# EAGLE board LocoShield_array (EAGLE 7.7.0)
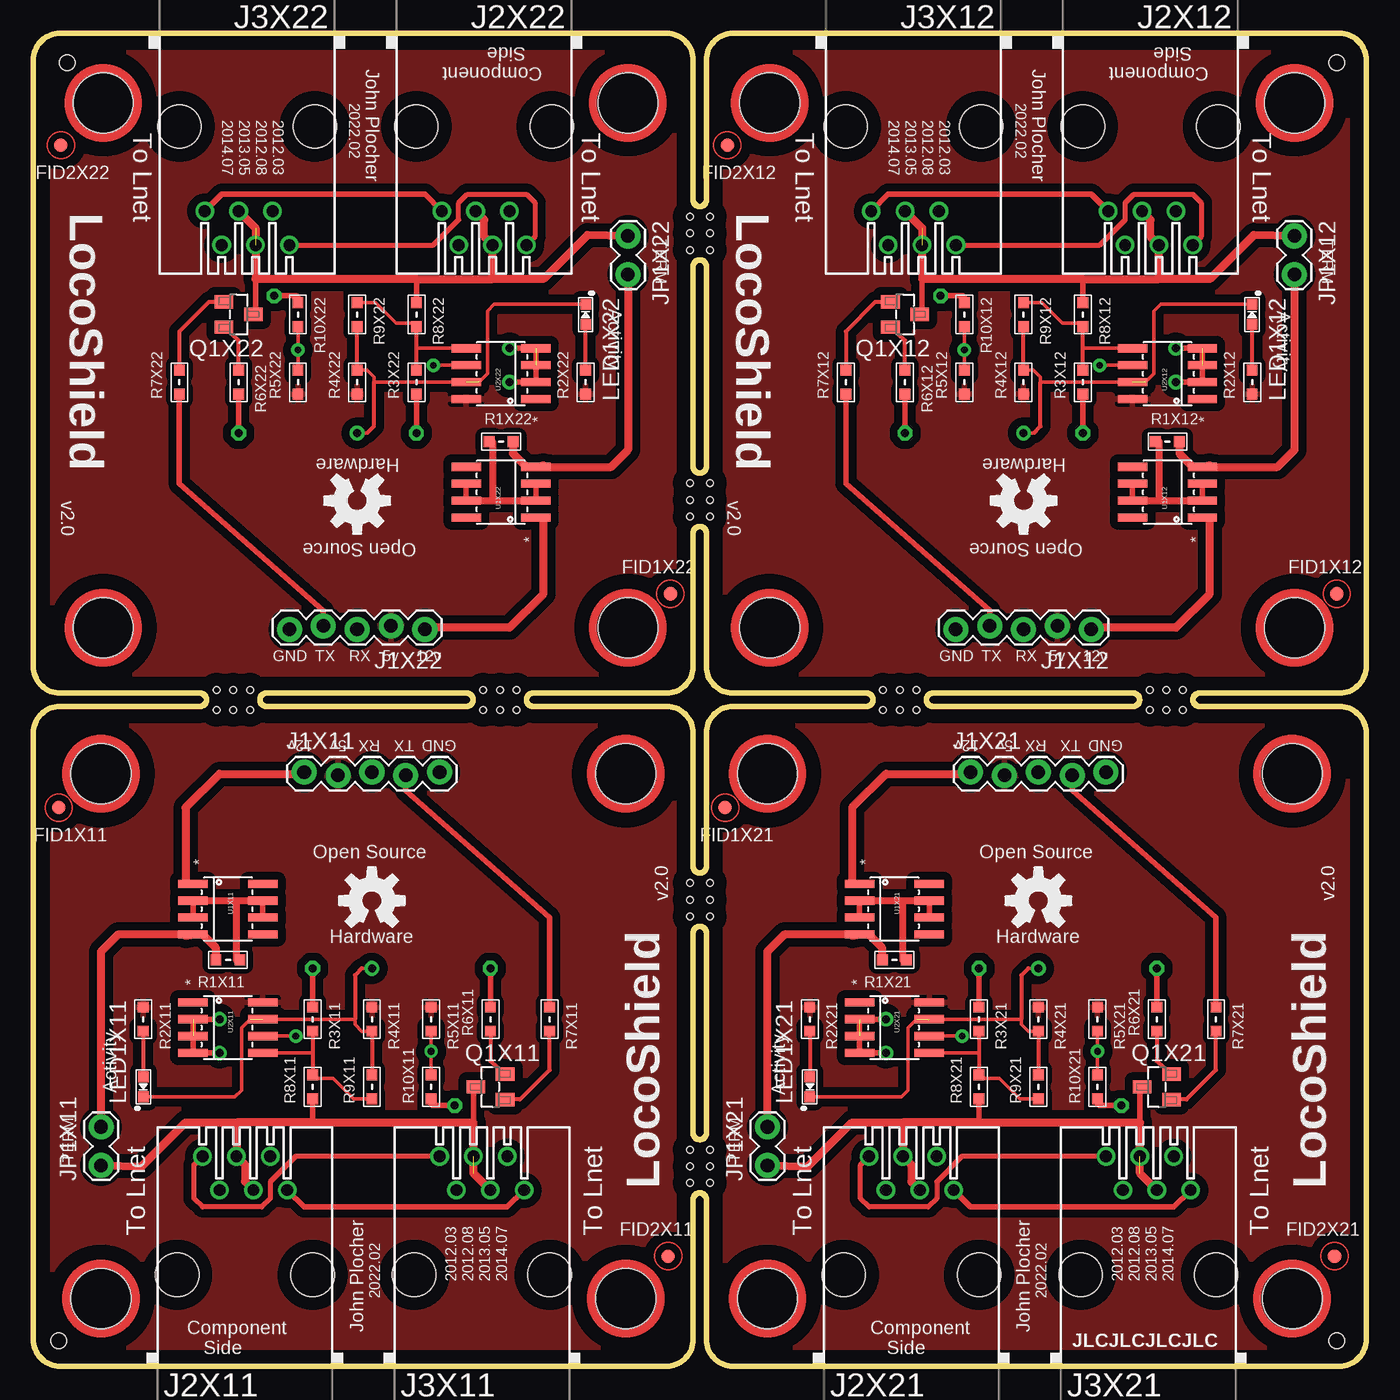
[diagram p0: board, top side]
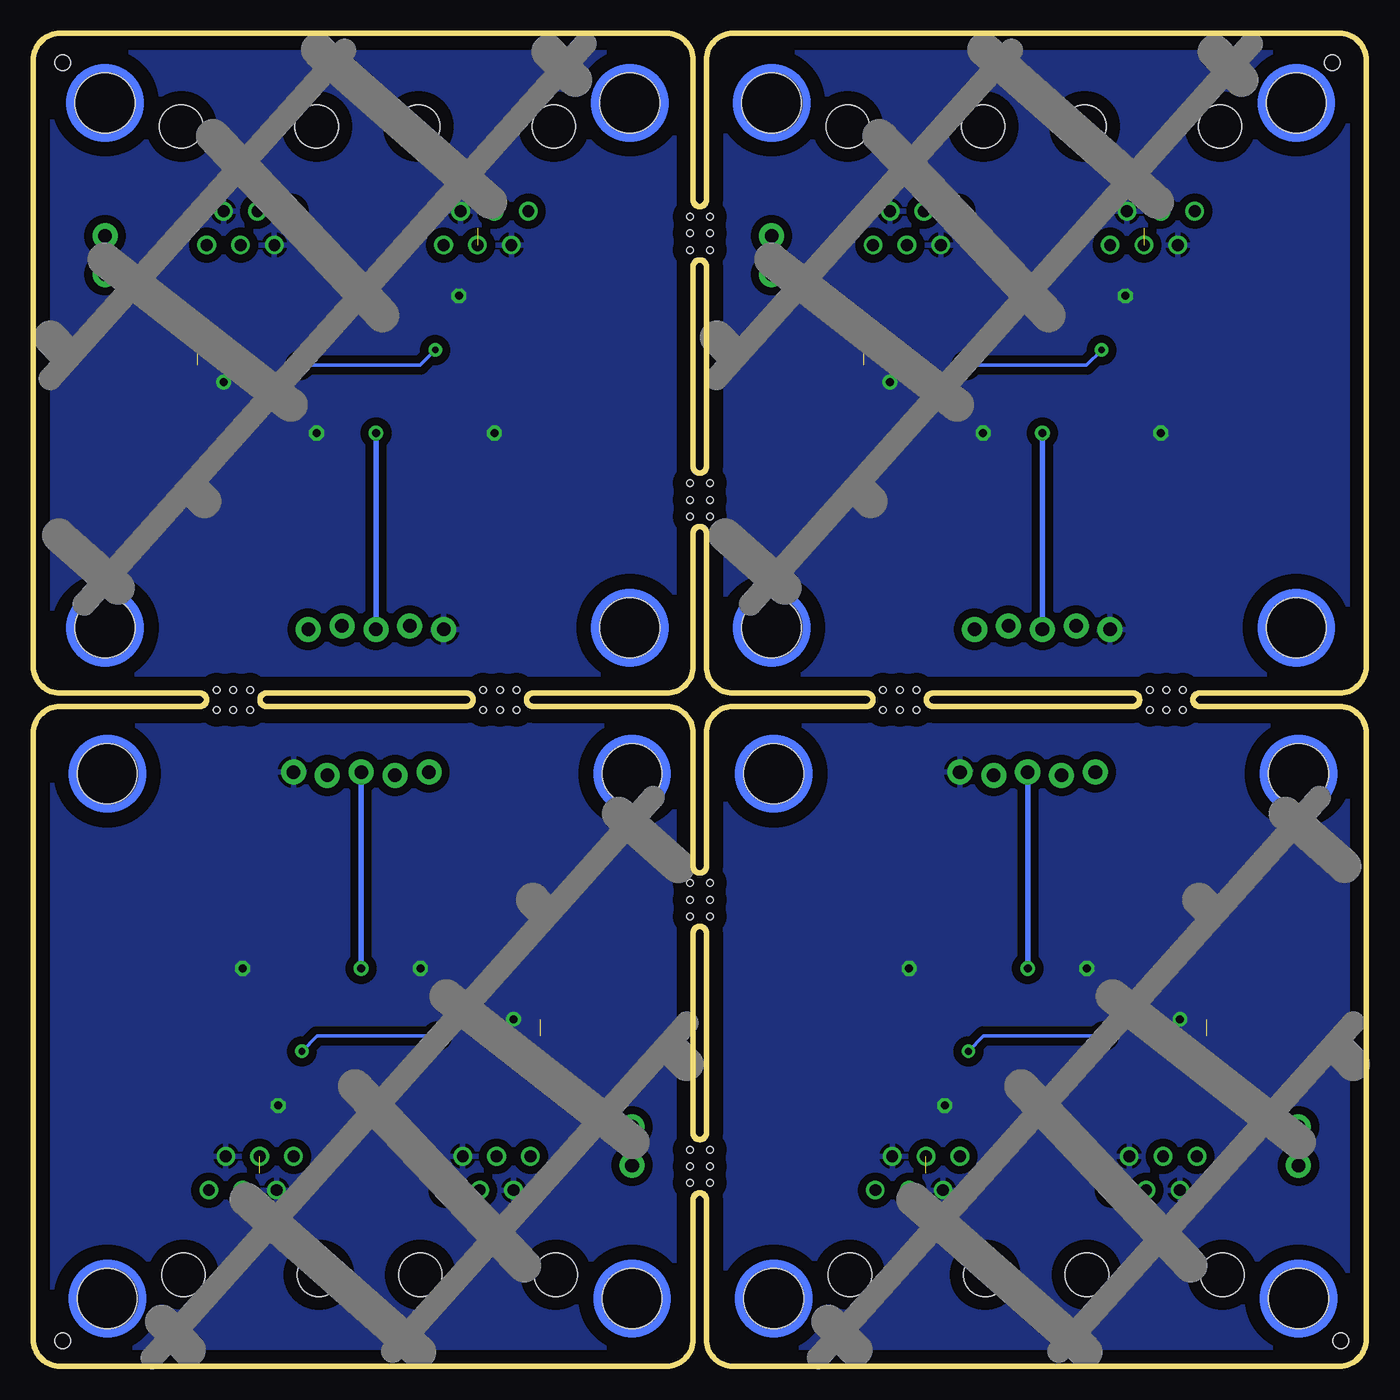
[diagram p1: board, bottom side, seen from below]

Size 100 x 100 mm. Coordinates in mm from the lower left corner, seen from the top.
Copper layers (1*16): Top 0.035mm / dielectric 1.5mm / Bottom 0.035mm
Design rules "default": minimum track width 10mil, minimum drill 0.6mm, track to track 8mil, track to pad 8mil, pad to pad 8mil, via to via 8mil, smd to smd 8mil, copper to edge 40mil, drill to drill 8mil, minimum pad ring 10mil, minimum via ring 8mil, stop-mask expansion 4mil, vias tented up to drill 0mil, thermal gap 10mil

## Footprints (pad centres in the part's own frame; a part is rotated, then mirrored left to right if it is on the bottom)
FIDUCIAL_1MM = smd 1 x 1: 1 0,0
MOUNTINGHOLE-L = hole 4.5: 0,0
1X05_LOCK = drill 1.016 pad 1.88: 1 0,0.127; 2 2.54,-0.127; 3 5.08,0.127; 4 7.62,-0.127; 5 10.16,0.127
RJ25-PANEL = drill 0.889: 1 -3.175,8.89; 2 -1.905,6.35; 3 -0.635,8.89; 4 0.635,6.35; 5 1.905,8.89; 6 3.175,6.35 | hole 3.251: -5.08,0; 5.08,0
1X02_LOCK = drill 1.016 pad 1.88: 1 -0.178,0; 2 2.718,0
0603-LED = smd 0.8 x 0.8: A 0.75,0; C -0.75,0
SOT23 = smd 1.4 x 1: 1 1.1,-0.95; 2 1.1,0.95; 3 -1.1,0
0603-RES = smd 0.813 x 0.813: 1 -0.9,0; 2 0.9,0
SO08 = smd 0.61 x 2.21: 1 -1.905,-2.616; 2 -0.635,-2.616; 3 0.635,-2.616; 4 1.905,-2.616; 5 1.905,2.616; 6 0.635,2.616; 7 -0.635,2.616; 8 -1.905,2.616
BOARD-10X10-2X2-PANEL-MB = hole 0.5: 49.25,86.25; 49.25,85; 49.25,83.75; 50.75,86.25; 50.75,85; 50.75,83.75; 49.25,66.25; 49.25,65; 49.25,63.75; 50.75,66.25; 50.75,65; 50.75,63.75; 49.25,36.25; 49.25,35; 49.25,33.75; 50.75,36.25; 50.75,35; 50.75,33.75; 49.25,16.25; 49.25,15; 49.25,13.75; 50.75,16.25; 50.75,15; 50.75,13.75; 13.75,49.25; 15,49.25; 16.25,49.25; 13.75,50.75; 15,50.75; 16.25,50.75; 33.75,49.25; 35,49.25; 36.25,49.25; 33.75,50.75; 35,50.75; 36.25,50.75; 63.75,49.25; 65,49.25; 66.25,49.25; 63.75,50.75; 65,50.75; 66.25,50.75; 83.75,49.25; 85,49.25; 86.25,49.25; 83.75,50.75; 85,50.75; 86.25,50.75
MOUNTINGHOLE-TOOL = hole 1.152: 0,0

## Placement (x,y rotation side)
FID1X11  FIDUCIAL  [FIDUCIAL_1MM]  1.91,41.91 0 top
FID1X12  FIDUCIAL  [FIDUCIAL_1MM]  97.79,57.95 180 top
FID1X21  FIDUCIAL  [FIDUCIAL_1MM]  51.91,41.91 0 top
FID1X22  FIDUCIAL  [FIDUCIAL_1MM]  47.79,57.95 180 top
FID2X11  FIDUCIAL  [FIDUCIAL_1MM]  47.62,8.26 180 top
FID2X12  FIDUCIAL  [FIDUCIAL_1MM]  52.07,91.61 0 top
FID2X21  FIDUCIAL  [FIDUCIAL_1MM]  97.62,8.26 180 top
FID2X22  FIDUCIAL  [FIDUCIAL_1MM]  2.07,91.61 0 top
H1X11  MOUNTINGHOLEL  [MOUNTINGHOLE-L]  5.08,44.45 0 top
H1X12  MOUNTINGHOLEL  [MOUNTINGHOLE-L]  94.61,55.41 180 top
H1X21  MOUNTINGHOLEL  [MOUNTINGHOLE-L]  55.08,44.45 0 top
H1X22  MOUNTINGHOLEL  [MOUNTINGHOLE-L]  44.62,55.41 180 top
H2X11  MOUNTINGHOLEL  [MOUNTINGHOLE-L]  44.45,44.45 0 top
H2X12  MOUNTINGHOLEL  [MOUNTINGHOLE-L]  55.24,55.41 180 top
H2X21  MOUNTINGHOLEL  [MOUNTINGHOLE-L]  94.45,44.45 0 top
H2X22  MOUNTINGHOLEL  [MOUNTINGHOLE-L]  5.25,55.41 180 top
H3X11  MOUNTINGHOLEL  [MOUNTINGHOLE-L]  44.45,5.08 0 top
H3X12  MOUNTINGHOLEL  [MOUNTINGHOLE-L]  55.24,94.78 180 top
H3X21  MOUNTINGHOLEL  [MOUNTINGHOLE-L]  94.45,5.08 0 top
H3X22  MOUNTINGHOLEL  [MOUNTINGHOLE-L]  5.25,94.78 180 top
H4X11  MOUNTINGHOLEL  [MOUNTINGHOLE-L]  5.08,5.08 0 top
H4X12  MOUNTINGHOLEL  [MOUNTINGHOLE-L]  94.61,94.78 180 top
H4X21  MOUNTINGHOLEL  [MOUNTINGHOLE-L]  55.08,5.08 0 top
H4X22  MOUNTINGHOLEL  [MOUNTINGHOLE-L]  44.62,94.78 180 top
J1X11  0.100  [1X05_LOCK]  20.32,44.45 0 top
J1X12  0.100  [1X05_LOCK]  79.38,55.41 180 top
J1X21  0.100  [1X05_LOCK]  70.32,44.45 0 top
J1X22  0.100  [1X05_LOCK]  29.38,55.41 180 top
J2X11  RJ12/6  [RJ25-PANEL]  15.88,6.86 0 top
J2X12  RJ12/6  [RJ25-PANEL]  83.82,93 180 top
J2X21  RJ12/6  [RJ25-PANEL]  65.88,6.86 0 top
J2X22  RJ12/6  [RJ25-PANEL]  33.82,93 180 top
J3X11  RJ12/6  [RJ25-PANEL]  33.66,6.86 0 top
J3X12  RJ12/6  [RJ25-PANEL]  66.04,93 180 top
J3X21  RJ12/6  [RJ25-PANEL]  83.66,6.86 0 top
J3X22  RJ12/6  [RJ25-PANEL]  16.04,93 180 top
JP1X11  0.100  [1X02_LOCK]  5.08,15.24 90 top
JP1X12  0.100  [1X02_LOCK]  94.61,84.62 270 top
JP1X21  0.100  [1X02_LOCK]  55.08,15.24 90 top
JP1X22  0.100  [1X02_LOCK]  44.62,84.62 270 top
LED1X11  B  [0603-LED]  8.26,20.95 90 top
LED1X12  B  [0603-LED]  91.44,78.91 270 top
LED1X21  B  [0603-LED]  58.26,20.95 90 top
LED1X22  B  [0603-LED]  41.44,78.91 270 top
Q1X11  2N3904  [SOT23]  34.29,20.95 0 top
Q1X12  2N3904  [SOT23]  65.41,78.91 180 top
Q1X21  2N3904  [SOT23]  84.29,20.95 0 top
Q1X22  2N3904  [SOT23]  15.4,78.91 180 top
R1X11  82R  [0603-RES]  14.61,30.48 180 top
R1X12  82R  [0603-RES]  85.09,69.38 0 top
R1X21  82R  [0603-RES]  64.61,30.48 180 top
R1X22  82R  [0603-RES]  35.09,69.38 0 top
R2X11  470R  [0603-RES]  8.26,26.04 270 top
R2X12  470R  [0603-RES]  91.44,73.83 90 top
R2X21  470R  [0603-RES]  58.26,26.04 270 top
R2X22  470R  [0603-RES]  41.44,73.83 90 top
R3X11  150k  [0603-RES]  20.95,26.04 270 top
R3X12  150k  [0603-RES]  78.74,73.83 90 top
R3X21  150k  [0603-RES]  70.95,26.04 270 top
R3X22  150k  [0603-RES]  28.74,73.83 90 top
R4X11  1k  [0603-RES]  25.4,26.04 270 top
R4X12  1k  [0603-RES]  74.3,73.83 90 top
R4X21  1k  [0603-RES]  75.4,26.04 270 top
R4X22  1k  [0603-RES]  24.3,73.83 90 top
R5X11  27k  [0603-RES]  29.84,26.04 270 top
R5X12  27k  [0603-RES]  69.85,73.83 90 top
R5X21  27k  [0603-RES]  79.84,26.04 270 top
R5X22  27k  [0603-RES]  19.85,73.83 90 top
R6X11  47R  [0603-RES]  34.29,26.04 90 top
R6X12  47R  [0603-RES]  65.41,73.83 270 top
R6X21  47R  [0603-RES]  84.29,26.04 90 top
R6X22  47R  [0603-RES]  15.4,73.83 270 top
R7X11  4k7  [0603-RES]  38.73,26.04 270 top
R7X12  4k7  [0603-RES]  60.96,73.83 90 top
R7X21  4k7  [0603-RES]  88.73,26.04 270 top
R7X22  4k7  [0603-RES]  10.96,73.83 90 top
R8X11  47k  [0603-RES]  20.95,20.95 90 top
R8X12  47k  [0603-RES]  78.74,78.91 270 top
R8X21  47k  [0603-RES]  70.95,20.95 90 top
R8X22  47k  [0603-RES]  28.74,78.91 270 top
R9X11  240k  [0603-RES]  25.4,20.95 90 top
R9X12  240k  [0603-RES]  74.3,78.91 270 top
R9X21  240k  [0603-RES]  75.4,20.95 90 top
R9X22  240k  [0603-RES]  24.3,78.91 270 top
R10X11  39k  [0603-RES]  29.84,20.95 90 top
R10X12  39k  [0603-RES]  69.85,78.91 270 top
R10X21  39k  [0603-RES]  79.84,20.95 90 top
R10X22  39k  [0603-RES]  19.85,78.91 270 top
U1X11  LM317LCDR  [SO08]  14.61,34.29 270 top
U1X12  LM317LCDR  [SO08]  85.09,65.57 90 top
U1X21  LM317LCDR  [SO08]  64.61,34.29 270 top
U1X22  LM317LCDR  [SO08]  35.09,65.57 90 top
U2X1  [BOARD-10X10-2X2-PANEL-MB]  0,0 0 top
U2X2  [MOUNTINGHOLE-TOOL]  2.54,97.79 0 top
U2X3  [MOUNTINGHOLE-TOOL]  97.79,97.79 0 top
U2X4  [MOUNTINGHOLE-TOOL]  1.91,1.91 0 top
U2X5  [MOUNTINGHOLE-TOOL]  97.79,1.91 0 top
U2X11  LM393M  [SO08]  14.61,25.4 270 top
U2X12  LM393M  [SO08]  85.09,74.46 90 top
U2X21  LM393M  [SO08]  64.61,25.4 270 top
U2X22  LM393M  [SO08]  35.09,74.46 90 top
U$3X11  OSHW  [OSHW-LOGO-M]  25.4,34.92 0 top
U$3X12  OSHW  [OSHW-LOGO-M]  74.3,64.94 180 top
U$3X21  OSHW  [OSHW-LOGO-M]  75.4,34.92 0 top
U$3X22  OSHW  [OSHW-LOGO-M]  24.3,64.94 180 top

## Library data of the parts
FID1X11 FID1X12 FID1X21 FID1X22 FID2X11 FID2X12 FID2X21 FID2X22 H1X11 H1X12 H1X21 H1X22 H2X11 H2X12 H2X21 H2X22 H3X11 H3X12 H3X21 H3X22 H4X11 H4X12 H4X21 H4X22 J1X11 J1X12 J1X21 J1X22 J2X11 J2X12 J2X21 J2X22 J3X11 J3X12 J3X21 J3X22 JP1X11 JP1X12 JP1X21 JP1X22 LED1X11 LED1X12 LED1X21 LED1X22 Q1X11 Q1X12 Q1X21 Q1X22 R1X11 R1X12 R1X21 R1X22 R2X11 R2X12 R2X21 R2X22 R3X11 R3X12 R3X21 R3X22 R4X11 R4X12 R4X21 R4X22 R5X11 R5X12 R5X21 R5X22 R6X11 R6X12 R6X21 R6X22 R7X11 R7X12 R7X21 R7X22 R8X11 R8X12 R8X21 R8X22 R9X11 R9X12 R9X21 R9X22 R10X11 R10X12 R10X21 R10X22 U1X11 U1X12 U1X21 U1X22 U2X1-U2X5 U2X11 U2X12 U2X21 U2X22 U$3X11 U$3X12 U$3X21 U$3X22 = SPCoast

## Nets
DCCRAILSYNC-X11: J2X11.1 J3X11.1
DCCRAILSYNC-X12: J2X12.1 J3X12.1
DCCRAILSYNC-X21: J2X21.1 J3X21.1
DCCRAILSYNC-X22: J2X22.1 J3X22.1
GNDX11: J1X11.5 J2X11.2 J2X11.5 J3X11.2 J3X11.5 R3X11.1 R6X11.2 R10X11.1 U2X11.2 U2X11.3 U2X11.4
GNDX12: J1X12.5 J2X12.2 J2X12.5 J3X12.2 J3X12.5 R3X12.1 R6X12.2 R10X12.1 U2X12.2 U2X12.3 U2X12.4
GNDX21: J1X21.5 J2X21.2 J2X21.5 J3X21.2 J3X21.5 R3X21.1 R6X21.2 R10X21.1 U2X21.2 U2X21.3 U2X21.4
GNDX22: J1X22.5 J2X22.2 J2X22.5 J3X22.2 J3X22.5 R3X22.1 R6X22.2 R10X22.1 U2X22.2 U2X22.3 U2X22.4
LNRXX11: J1X11.3 LED1X11.C R4X11.2 R9X11.2 U2X11.7
LNRXX12: J1X12.3 LED1X12.C R4X12.2 R9X12.2 U2X12.7
LNRXX21: J1X21.3 LED1X21.C R4X21.2 R9X21.2 U2X21.7
LNRXX22: J1X22.3 LED1X22.C R4X22.2 R9X22.2 U2X22.7
LNTXX11: J1X11.4 R7X11.1
LNTXX12: J1X12.4 R7X12.1
LNTXX21: J1X21.4 R7X21.1
LNTXX22: J1X22.4 R7X22.1
LOCONETX11: J2X11.3 J2X11.4 J3X11.3 J3X11.4 JP1X11.1 Q1X11.3 R8X11.1
LOCONETX12: J2X12.3 J2X12.4 J3X12.3 J3X12.4 JP1X12.1 Q1X12.3 R8X12.1
LOCONETX21: J2X21.3 J2X21.4 J3X21.3 J3X21.4 JP1X21.1 Q1X21.3 R8X21.1
LOCONETX22: J2X22.3 J2X22.4 J3X22.3 J3X22.4 JP1X22.1 Q1X22.3 R8X22.1
N$1X11: Q1X11.1 R7X11.2
N$1X12: Q1X12.1 R7X12.2
N$1X21: Q1X21.1 R7X21.2
N$1X22: Q1X22.1 R7X22.2
N$2X11: R3X11.2 R8X11.2 R9X11.1 U2X11.5
N$2X12: R3X12.2 R8X12.2 R9X12.1 U2X12.5
N$2X21: R3X21.2 R8X21.2 R9X21.1 U2X21.5
N$2X22: R3X22.2 R8X22.2 R9X22.1 U2X22.5
N$5X11: R5X11.2 R10X11.2 U2X11.6
N$5X12: R5X12.2 R10X12.2 U2X12.6
N$5X21: R5X21.2 R10X21.2 U2X21.6
N$5X22: R5X22.2 R10X22.2 U2X22.6
N$6X11: Q1X11.2 R6X11.1
N$6X12: Q1X12.2 R6X12.1
N$6X21: Q1X21.2 R6X21.1
N$6X22: Q1X22.2 R6X22.1
N$15X11: LED1X11.A R2X11.2
N$15X12: LED1X12.A R2X12.2
N$15X21: LED1X21.A R2X21.2
N$15X22: LED1X22.A R2X22.2
N$20X11: JP1X11.2 R1X11.2 U1X11.4
N$20X12: JP1X12.2 R1X12.2 U1X12.4
N$20X21: JP1X21.2 R1X21.2 U1X21.4
N$20X22: JP1X22.2 R1X22.2 U1X22.4
RAILSYNC+X11: J2X11.6 J3X11.6
RAILSYNC+X12: J2X12.6 J3X12.6
RAILSYNC+X21: J2X21.6 J3X21.6
RAILSYNC+X22: J2X22.6 J3X22.6
V+X11: J1X11.1 U1X11.1
V+X12: J1X12.1 U1X12.1
V+X21: J1X21.1 U1X21.1
V+X22: J1X22.1 U1X22.1
VCCX11: J1X11.2 R2X11.1 R4X11.1 R5X11.1 U2X11.8
VCCX12: J1X12.2 R2X12.1 R4X12.1 R5X12.1 U2X12.8
VCCX21: J1X21.2 R2X21.1 R4X21.1 R5X21.1 U2X21.8
VCCX22: J1X22.2 R2X22.1 R4X22.1 R5X22.1 U2X22.8
VOUTX11: R1X11.1 U1X11.2 U1X11.3 U1X11.6 U1X11.7
VOUTX12: R1X12.1 U1X12.2 U1X12.3 U1X12.6 U1X12.7
VOUTX21: R1X21.1 U1X21.2 U1X21.3 U1X21.6 U1X21.7
VOUTX22: R1X22.1 U1X22.2 U1X22.3 U1X22.6 U1X22.7

## Tracks (layer width: path | path; a pad name or v marks a point on that pad's centre or on a via)
DCCRAILSYNC-X11
  Top 0.381: J2X11.1 12.06,15.11 12.06,12.57 12.7,11.94 17.14,11.94 17.78,12.57 17.78,13.84 19.68,15.75 J3X11.1
DCCRAILSYNC-X12
  Top 0.381: J2X12.1 87.63,84.75 87.63,87.29 87,87.92 82.55,87.92 81.92,87.29 81.92,86.02 80.01,84.11 J3X12.1
DCCRAILSYNC-X21
  Top 0.381: J2X21.1 62.06,15.11 62.06,12.57 62.7,11.94 67.14,11.94 67.78,12.57 67.78,13.84 69.69,15.75 J3X21.1
DCCRAILSYNC-X22
  Top 0.381: J2X22.1 37.63,84.75 37.63,87.29 36.99,87.92 32.55,87.92 31.91,87.29 31.91,86.02 30.01,84.11 J3X22.1
GNDX11  (via drill 0.6 pad 1.11)  (1 unrouted)
  Top 0.406: R6X11.2 v34.29,29.84 | U2X11.2 U2X11.4 v13.97,23.5 | R3X11.1 v20.95,29.84 | R10X11.1 29.84,19.68 29.97,19.56 v31.62,19.56 | v13.97,26.04 11.43,26.04
  pour Bottom (isolate 0.61): 1.02,48.64 48.64,48.64 48.64,1.02 1.02,1.02
GNDX12  (via drill 0.6 pad 1.11)  (1 unrouted)
  Top 0.406: R6X12.2 v65.41,70.02 | U2X12.2 U2X12.4 v85.72,76.36 | R3X12.1 v78.74,70.02 | R10X12.1 69.85,80.17 69.72,80.3 v68.07,80.3 | v85.72,73.83 88.27,73.83
  pour Bottom (isolate 0.61): 98.68,51.22 51.05,51.22 51.05,98.84 98.68,98.84
GNDX21  (via drill 0.6 pad 1.11)  (1 unrouted)
  Top 0.406: R6X21.2 v84.29,29.84 | U2X21.2 U2X21.4 v63.97,23.5 | R3X21.1 v70.95,29.84 | R10X21.1 79.84,19.68 79.97,19.56 v81.62,19.56 | v63.97,26.04 61.43,26.04
  pour Bottom (isolate 0.61): 51.02,48.64 98.64,48.64 98.64,1.02 51.02,1.02
GNDX22  (via drill 0.6 pad 1.11)  (1 unrouted)
  Top 0.406: R6X22.2 v15.4,70.02 | U2X22.2 U2X22.4 v35.73,76.36 | R3X22.1 v28.74,70.02 | R10X22.1 19.85,80.17 19.72,80.3 v18.07,80.3 | v35.73,73.83 38.27,73.83
  pour Bottom (isolate 0.61): 48.68,51.22 1.05,51.22 1.05,98.84 48.68,98.84
LNRXX11  (via drill 0.6 pad 1.11)  (1 unrouted)
  Top 0.254: v25.4,29.84 24.64,29.84 | R4X11.2 24.65,25.14 24.13,25.65 24.13,26.04 16.26,26.04 15.62,25.4 15.62,20.7 15.11,20.19 LED1X11.C
  Top 0.305: R4X11.2 R9X11.2 | 24.64,29.84 24.13,29.34 24.13,26.04
  Bottom 0.406: J1X11.3 v25.4,29.84
LNRXX12  (via drill 0.6 pad 1.11)  (1 unrouted)
  Top 0.254: v74.3,70.02 75.06,70.02 | R4X12.2 75.05,74.72 75.56,74.21 75.56,73.83 83.44,73.83 84.07,74.46 84.07,79.16 84.58,79.67 91.43,79.67 LED1X12.C
  Top 0.305: R4X12.2 R9X12.2 | 75.06,70.02 75.56,70.52 75.56,73.83
  Bottom 0.406: J1X12.3 v74.3,70.02
LNRXX21  (via drill 0.6 pad 1.11)  (1 unrouted)
  Top 0.254: v75.4,29.84 74.64,29.84 | R4X21.2 74.65,25.14 74.13,25.65 74.13,26.04 66.26,26.04 65.62,25.4 65.62,20.7 65.11,20.19 LED1X21.C
  Top 0.305: R4X21.2 R9X21.2 | 74.64,29.84 74.13,29.34 74.13,26.04
  Bottom 0.406: J1X21.3 v75.4,29.84
LNRXX22  (via drill 0.6 pad 1.11)  (1 unrouted)
  Top 0.254: v24.3,70.02 25.06,70.02 | R4X22.2 25.05,74.72 25.57,74.21 25.57,73.83 33.44,73.83 34.07,74.46 34.07,79.16 34.58,79.67 41.43,79.67 LED1X22.C
  Top 0.305: R4X22.2 R9X22.2 | 25.06,70.02 25.57,70.52 25.57,73.83
  Bottom 0.406: J1X22.3 v24.3,70.02
LNTXX11
  Top 0.406: R7X11.1 38.73,33.66 27.94,43.18 J1X11.4
LNTXX12
  Top 0.406: R7X12.1 60.96,66.2 71.75,56.68 J1X12.4
LNTXX21
  Top 0.406: R7X21.1 88.73,33.66 77.94,43.18 J1X21.4
LNTXX22
  Top 0.406: R7X22.1 10.96,66.2 21.75,56.68 J1X22.4
LOCONETX11  (1 unrouted)
  Top 0.406: 33.02,20.95 Q1X11.3 33.02,20.79 33.02,18.29 | R8X11.1 20.95,18.29
  Top 0.61: J2X11.4 15.88,13.84 15.88,15.11 J2X11.3 15.24,18.29 | J3X11.4 33.02,14.48 33.02,18.29 20.95,18.29 15.24,18.29 | JP1X11.1 8.13,14.99 11.43,18.29 15.24,18.29
LOCONETX12  (1 unrouted)
  Top 0.406: 66.67,78.91 Q1X12.3 66.67,79.08 66.67,81.57 | R8X12.1 78.74,81.57
  Top 0.61: J2X12.4 83.82,86.02 83.82,84.75 J2X12.3 84.45,81.57 | J3X12.4 66.67,85.38 66.67,81.57 78.74,81.57 84.45,81.57 | JP1X12.1 91.57,84.87 88.27,81.57 84.45,81.57
LOCONETX21  (1 unrouted)
  Top 0.406: 83.02,20.95 Q1X21.3 83.02,20.79 83.02,18.29 | R8X21.1 70.95,18.29
  Top 0.61: J2X21.4 65.88,13.84 65.88,15.11 J2X21.3 65.24,18.29 | J3X21.4 83.02,14.48 83.02,18.29 70.95,18.29 65.24,18.29 | JP1X21.1 58.13,14.99 61.43,18.29 65.24,18.29
LOCONETX22  (1 unrouted)
  Top 0.406: 16.68,78.91 Q1X22.3 16.68,79.08 16.68,81.57 | R8X22.1 28.74,81.57
  Top 0.61: J2X22.4 33.82,86.02 33.82,84.75 J2X22.3 34.45,81.57 | J3X22.4 16.68,85.38 16.68,81.57 28.74,81.57 34.45,81.57 | JP1X22.1 41.57,84.87 38.27,81.57 34.45,81.57
N$1X11
  Top 0.305: 35.29,20.05 Q1X11.1 36.52,20 38.73,22.23 R7X11.2
N$1X12
  Top 0.305: 64.41,79.81 Q1X12.1 63.18,79.86 60.96,77.64 R7X12.2
N$1X21
  Top 0.305: 85.29,20.05 Q1X21.1 86.52,20 88.73,22.23 R7X21.2
N$1X22
  Top 0.305: 14.4,79.81 Q1X22.1 13.18,79.86 10.96,77.64 R7X22.2
N$2X11
  Top 0.254: R9X11.1 24.01,20.05 22.48,21.59 21.22,21.59 R8X11.2 | U2X11.5 20.95,23.5
  Top 0.305: U2X11.5 17.14,23.5 | R3X11.2 20.95,23.5 R8X11.2
N$2X12
  Top 0.254: R9X12.1 75.68,79.81 77.22,78.27 78.47,78.27 R8X12.2 | U2X12.5 78.74,76.36
  Top 0.305: U2X12.5 82.55,76.36 | R3X12.2 78.74,76.36 R8X12.2
N$2X21
  Top 0.254: R9X21.1 74.01,20.05 72.48,21.59 71.22,21.59 R8X21.2 | U2X21.5 70.95,23.5
  Top 0.305: U2X21.5 67.14,23.5 | R3X21.2 70.95,23.5 R8X21.2
N$2X22
  Top 0.254: R9X22.1 25.68,79.81 27.22,78.27 28.48,78.27 R8X22.2 | U2X22.5 28.74,76.36
  Top 0.305: U2X22.5 32.55,76.36 | R3X22.2 28.74,76.36 R8X22.2
N$5X11  (via drill 0.5 pad 1.01)
  Top 0.254: U2X11.6 v19.68,24.77 | v29.84,23.62 29.84,24.77 | v29.84,23.62 R10X11.2 | v29.84,23.62 R5X11.2
  Top 0.305: U2X11.6 16.51,24.77
  Bottom 0.254: v19.68,24.77 28.7,24.77 v29.84,23.62
N$5X12  (via drill 0.5 pad 1.01)
  Top 0.254: U2X12.6 v80.01,75.09 | v69.85,76.24 69.85,75.09 | v69.85,76.24 R10X12.2 | v69.85,76.24 R5X12.2
  Top 0.305: U2X12.6 83.19,75.09
  Bottom 0.254: v80.01,75.09 70.99,75.09 v69.85,76.24
N$5X21  (via drill 0.5 pad 1.01)
  Top 0.254: U2X21.6 v69.69,24.77 | v79.84,23.62 79.84,24.77 | v79.84,23.62 R10X21.2 | v79.84,23.62 R5X21.2
  Top 0.305: U2X21.6 66.51,24.77
  Bottom 0.254: v69.69,24.77 78.7,24.77 v79.84,23.62
N$5X22  (via drill 0.5 pad 1.01)
  Top 0.254: U2X22.6 v30.01,75.09 | v19.85,76.24 19.85,75.09 | v19.85,76.24 R10X22.2 | v19.85,76.24 R5X22.2
  Top 0.305: U2X22.6 33.19,75.09
  Bottom 0.254: v30.01,75.09 20.99,75.09 v19.85,76.24
N$6X11
  Top 0.305: R6X11.1 34.29,22.91 Q1X11.2
N$6X12
  Top 0.305: R6X12.1 65.41,76.95 Q1X12.2
N$6X21
  Top 0.305: R6X21.1 84.29,22.91 Q1X21.2
N$6X22
  Top 0.305: R6X22.1 15.4,76.95 Q1X22.2
N$15X11
  Top 0.305: R2X11.2 LED1X11.A
N$15X12
  Top 0.305: R2X12.2 LED1X12.A
N$15X21
  Top 0.305: R2X21.2 LED1X21.A
N$15X22
  Top 0.305: R2X22.2 LED1X22.A
N$20X11
  Top 0.406: 11.43,32.38 U1X11.4
  Top 0.61: R1X11.2 13.71,31.38 12.7,32.38 U1X11.4 11.43,32.28 | JP1X11.2 5.08,31.11 6.35,32.38 11.43,32.38
N$20X12
  Top 0.406: 88.27,67.47 U1X12.4
  Top 0.61: R1X12.2 85.99,68.48 87,67.47 U1X12.4 88.27,67.58 | JP1X12.2 94.61,68.75 93.34,67.47 88.27,67.47
N$20X21
  Top 0.406: 61.43,32.38 U1X21.4
  Top 0.61: R1X21.2 63.7,31.38 62.7,32.38 U1X21.4 61.43,32.28 | JP1X21.2 55.08,31.11 56.35,32.38 61.43,32.38
N$20X22
  Top 0.406: 38.27,67.47 U1X22.4
  Top 0.61: R1X22.2 35.99,68.48 36.99,67.47 U1X22.4 38.27,67.58 | JP1X22.2 44.62,68.75 43.34,67.47 38.27,67.47
RAILSYNC+X11
  Top 0.406: J2X11.6 20.32,11.94 35.56,11.94 J3X11.6
RAILSYNC+X12
  Top 0.406: J2X12.6 79.38,87.92 64.14,87.92 J3X12.6
RAILSYNC+X21
  Top 0.406: J2X21.6 70.32,11.94 85.56,11.94 J3X21.6
RAILSYNC+X22
  Top 0.406: J2X22.6 29.38,87.92 14.13,87.92 J3X22.6
V+X11
  Top 0.61: J1X11.1 20.32,44.45 13.97,44.45 11.43,41.91 11.43,36.3 U1X11.1
V+X12
  Top 0.61: J1X12.1 79.38,55.41 85.72,55.41 88.27,57.95 88.27,63.56 U1X12.1
V+X21
  Top 0.61: J1X21.1 70.32,44.45 63.97,44.45 61.43,41.91 61.43,36.3 U1X21.1
V+X22
  Top 0.61: J1X22.1 29.38,55.41 35.73,55.41 38.27,57.95 38.27,63.56 U1X22.1
VCCX11
  pour Top (isolate 0.61): 1.02,48.64 48.64,48.64 48.64,1.02 1.02,1.02
VCCX12
  pour Top (isolate 0.61): 98.68,51.22 51.05,51.22 51.05,98.84 98.68,98.84
VCCX21
  pour Top (isolate 0.61): 51.02,48.64 98.64,48.64 98.64,1.02 51.02,1.02
VCCX22
  pour Top (isolate 0.61): 48.68,51.22 1.05,51.22 1.05,98.84 48.68,98.84
VOUTX11
  Top 0.406: U1X11.6 U1X11.7 | U1X11.3 U1X11.2
  Top 0.508: U1X11.7 15.24,34.92 | 15.24,34.92 U1X11.2 | R1X11.1 15.24,30.48 15.24,34.92
VOUTX12
  Top 0.406: U1X12.6 U1X12.7 | U1X12.3 U1X12.2
  Top 0.508: U1X12.7 84.45,64.94 | 84.45,64.94 U1X12.2 | R1X12.1 84.45,69.38 84.45,64.94
VOUTX21
  Top 0.406: U1X21.6 U1X21.7 | U1X21.3 U1X21.2
  Top 0.508: U1X21.7 65.24,34.92 | 65.24,34.92 U1X21.2 | R1X21.1 65.24,30.48 65.24,34.92
VOUTX22
  Top 0.406: U1X22.6 U1X22.7 | U1X22.3 U1X22.2
  Top 0.508: U1X22.7 34.45,64.94 | 34.45,64.94 U1X22.2 | R1X22.1 34.45,69.38 34.45,64.94

## Text on the board
tPlace: Component / Side | Component / Side | John Plocher | John Plocher | 2022.02 | 2022.02 | 2014.07 | 2013.05 | 2012.08 | 2012.03 | 2014.07 | 2013.05 | 2012.08 | 2012.03 | To Lnet | To Lnet | To Lnet | To Lnet | LocoShield | LocoShield | TERM | TERM | Activity | Activity | * | * | Hardware | Hardware | v2.0 | v2.0 | Open Source | * | Open Source | * | GND | TX | RX | 5v | 12v | GND | TX | RX | 5v | 12v | 12v | 5v | RX | TX | GND | 12v | 5v | RX | TX | GND | * | Open Source | * | Open Source | v2.0 | v2.0 | Hardware | Hardware | * | * | Activity | Activity | To Lnet | To Lnet | To Lnet | To Lnet | TERM | TERM | LocoShield | LocoShield | 2012.03 | 2012.08 | 2013.05 | 2014.07 | 2012.03 | 2012.08 | 2013.05 | 2014.07 | 2022.02 | 2022.02 | John Plocher | John Plocher | Component / Side | Component / Side | JLCJLCJLCJLC
bDocu: www. | .com | Model Railroading is fun! | www. | .com | Model Railroading is fun! | SP Coast | SP Coast | RX pin goes to Timer ICP pin / Uno -> pin 8 / Leonardo -> pin 4 / Mega -> pin 48 (Timer 5) or 49 (T4) | RX pin goes to Timer ICP pin / Uno -> pin 8 / Leonardo -> pin 4 / Mega -> pin 48 (Timer 5) or 49 (T4) | Go Bears! | Go Bears! | Solder Side | Solder Side | LocoShield | LocoShield | Made in the PCR, Coast Division, NMRA | Made in the PCR, Coast Division, NMRA | Made in the PCR, Coast Division, NMRA | Made in the PCR, Coast Division, NMRA | LocoShield | LocoShield | Solder Side | Solder Side | Go Bears! | Go Bears! | RX pin goes to Timer ICP pin / Uno -> pin 8 / Leonardo -> pin 4 / Mega -> pin 48 (Timer 5) or 49 (T4) | RX pin goes to Timer ICP pin / Uno -> pin 8 / Leonardo -> pin 4 / Mega -> pin 48 (Timer 5) or 49 (T4) | SP Coast | SP Coast | Model Railroading is fun! | .com | www. | Model Railroading is fun! | .com | www.
_tNames: J3 | J2 | J3 | J2 | FID2 | FID2 | JP1 | JP1 | LED1 | LED1 | R10 | R9 | R8 | R10 | R9 | R8 | Q1 | Q1 | R7 | R6 | R5 | R4 | R3 | U2 | R2 | R7 | R6 | R5 | R4 | R3 | U2 | R2 | R1 | R1 | U1 | U1 | J1 | FID1 | J1 | FID1 | FID1 | J1 | FID1 | J1 | U1 | U1 | R1 | R1 | R2 | U2 | R3 | R4 | R5 | R6 | R7 | R2 | U2 | R3 | R4 | R5 | R6 | R7 | Q1 | Q1 | R8 | R9 | R10 | R8 | R9 | R10 | LED1 | LED1 | JP1 | JP1 | FID2 | FID2 | J2 | J3 | J2 | J3